# Altium PCB PPGColle.PcbDoc
Units mil, origin at the board's own origin, x right, y up, seen from the top; angles counter-clockwise.
Board outline 2000 x 2000 mil, 2 copper layers (Top Layer, Bottom Layer); 64 components, 66 nets, 270 pads, 85 vias.
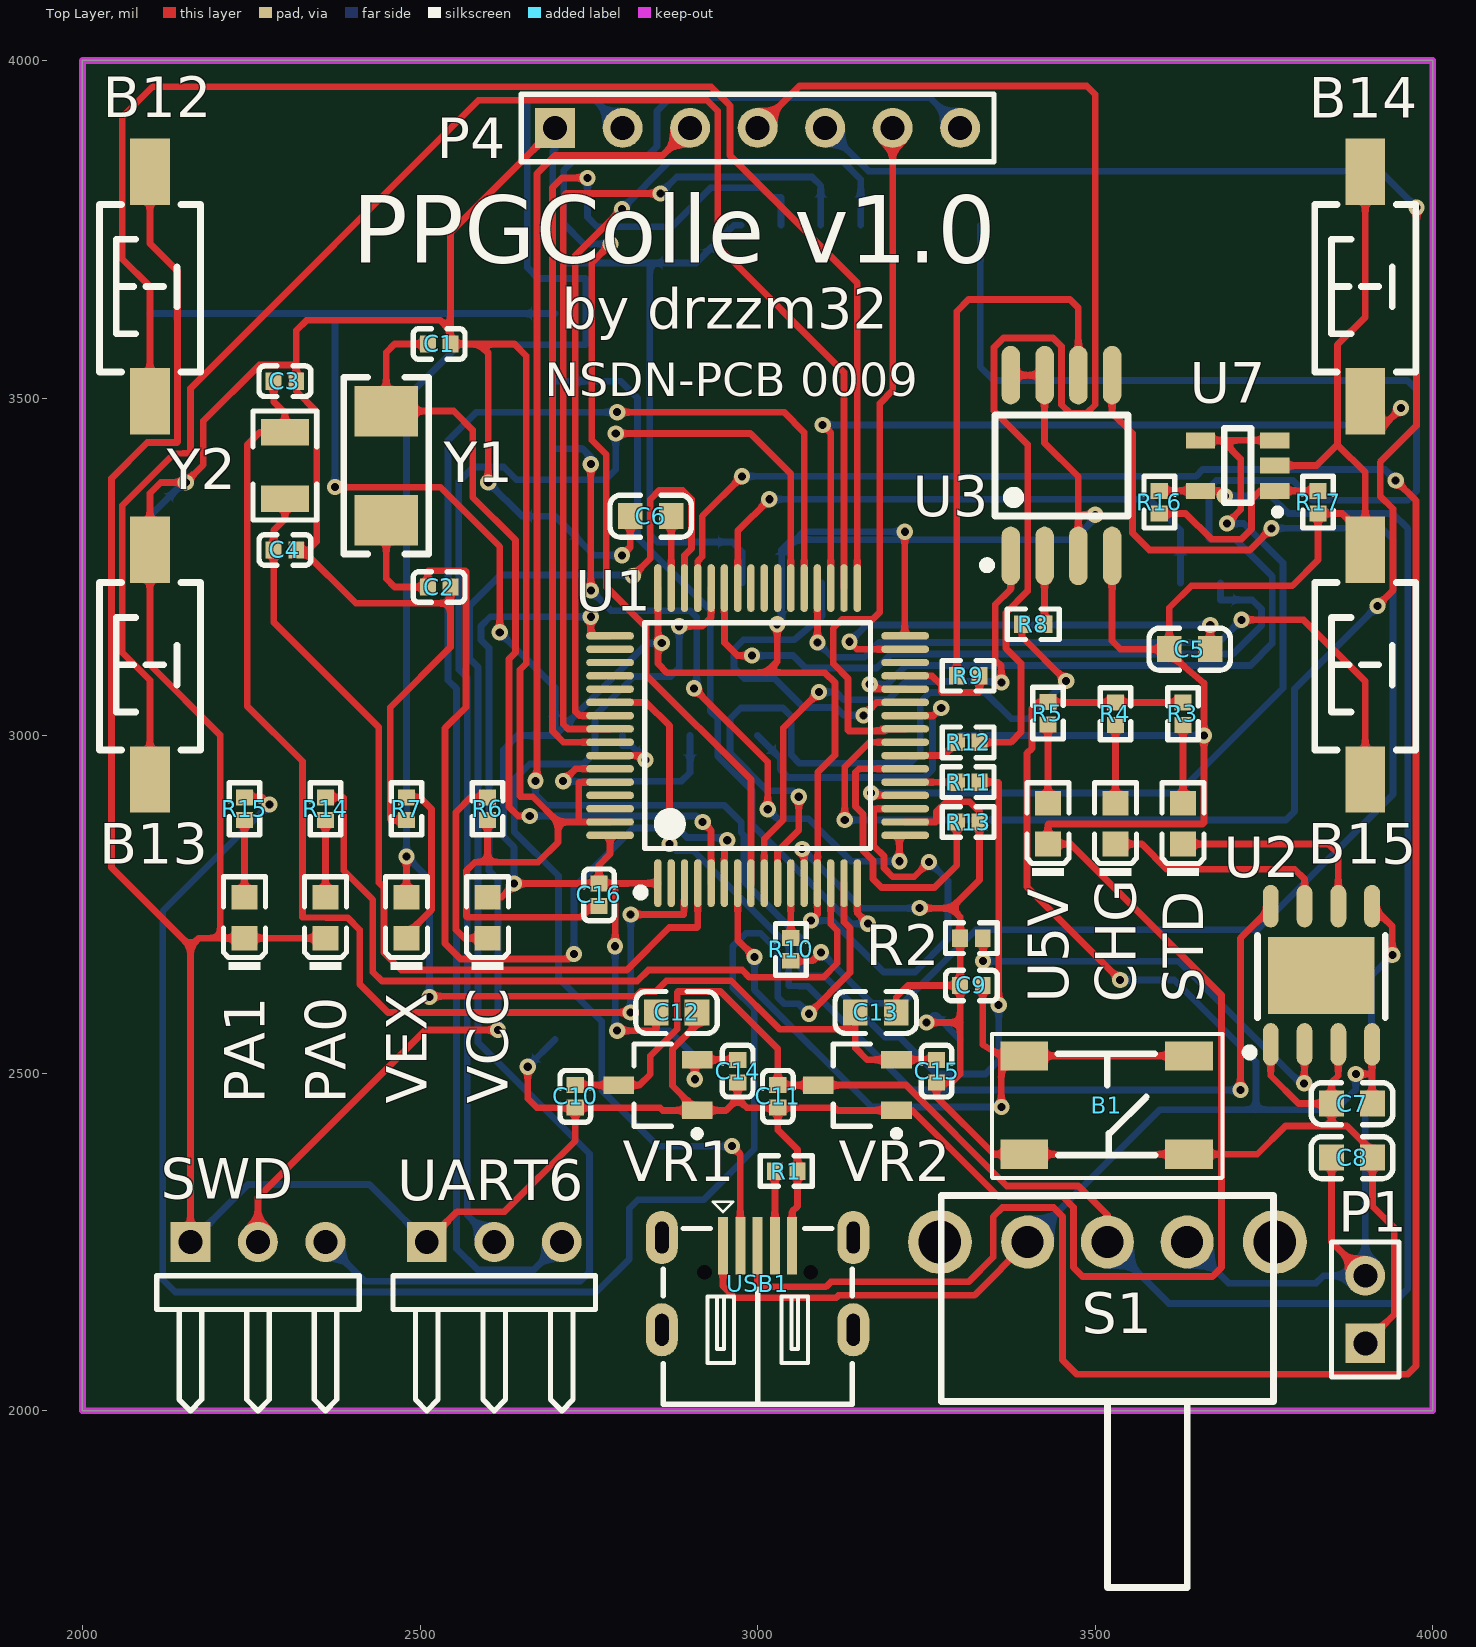
[diagram p0: Top Layer view]
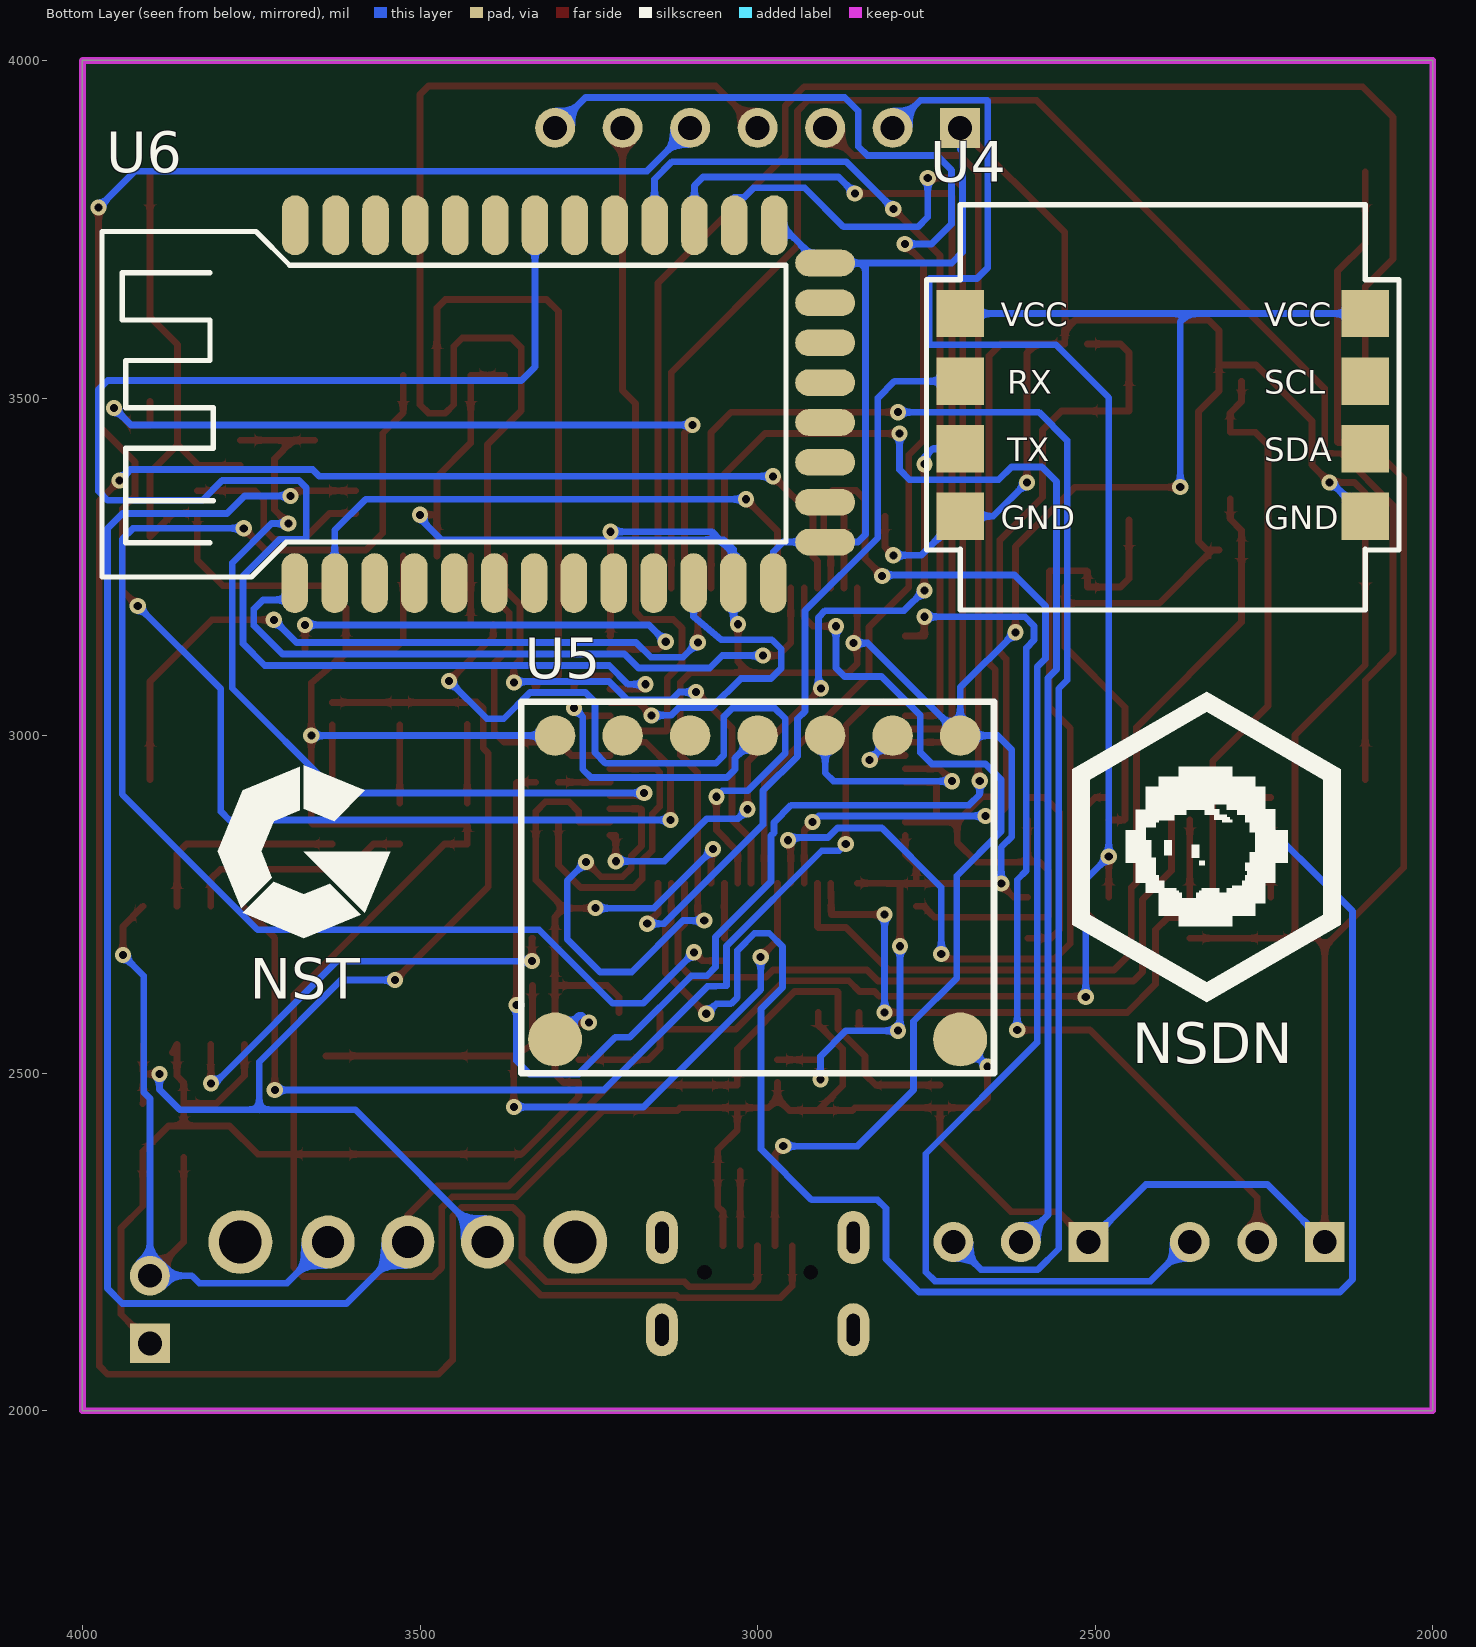
[diagram p1: Bottom Layer view, seen from below]
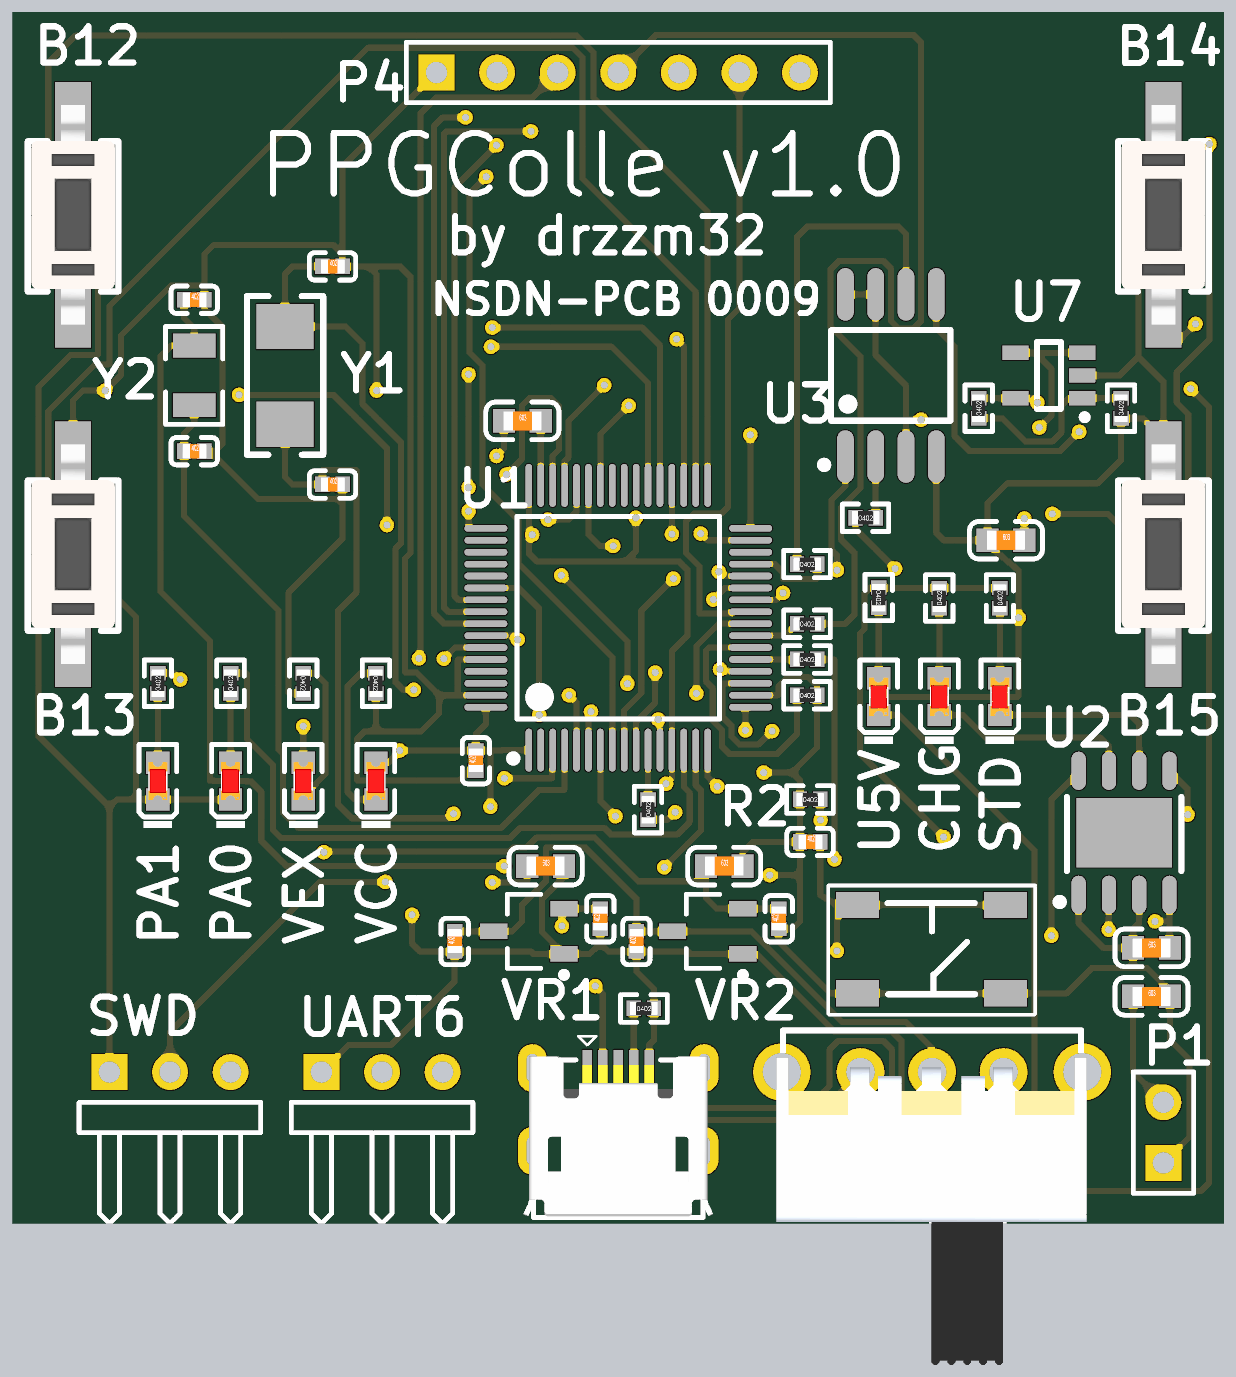
[diagram p2: 3D render of the assembled board from above, using the file's embedded part models]

## Layer stack, top to bottom
Top Solder: solder mask 0.4, Solder Resist, Dk 3.5
Top Layer: signal copper 1.4
Dielectric 1: dielectric 12.6, FR-4, Dk 4.8
Bottom Layer: signal copper 1.4
Bottom Solder: solder mask 0.4, Solder Resist, Dk 3.5

## Board outline
2000,2000 2000,4000 4000,4000 4000,2000

## Design rules (kind name [scope] priority, off if disabled: settings)
Clearance [All] p1: gap=6 ignorepadtopadclearanceinfootprint=FALSE
HoleSize [All] p1: absolutevalues=TRUE maxlimit=250 minlimit=11.81 maxpercent=80.000 minpercent=20.000
MinimumSolderMaskSliver [All] p1: minsoldermaskwidth=6
PolygonConnect [All] p1: connectstyle=Relief reliefconductorwidth=10 reliefentries=4 polygonreliefangle="90 Angle" airgapwidth=10
RoomDefinition PPGColle [InComponentClass('PPGColle')] p1: confinementstyle=ConfineIn formatcopy=TRUE lockcomponents=FALSE outline 2000,2000 4000,2000 4000,4000 2000,4000
RoutingVias [All] p1: holewidth=12 width=24 viastyle="Through Hole" minholewidth=11.81 minwidth=23.62 maxholewidth=28 maxwidth=50
SilkToSilkClearance [All] p1: silktosilkclearance=6
SilkToSolderMaskClearance [IsPad] p1: minsilkscreentomaskgap=6 clearancetoexposedcopper=TRUE
SolderMaskExpansion [All] p1: expansion=2
Width [All] p1: maxlimit=20 minlimit=6 preferedwidth=10
26 further rules are at their usual default settings.

## Components (designator, comment, footprint, x,y, rotation, side; value= is the part's Value field where it differs from the comment)
B1 "B1" MetalButton 3513.5,2454.41 r180 top locked
B12 "3x6x5" "TSW SMD-3*6*4.3" 2100,3665 r90 top locked (schematic designator SW1)
B13 "3x6x5" "TSW SMD-3*6*4.3" 2100,3105 r90 top locked (schematic designator SW2)
B14 "3x6x5" "TSW SMD-3*6*4.3" 3900,3665 r90 top locked (schematic designator SW3)
B15 "3x6x5" "TSW SMD-3*6*4.3" 3900,3105 r90 top locked (schematic designator SW4)
C1 "20pF (200) 5% 50V" 0402_C 2528.27,3580 r0 top
C2 "20pF (200) 5% 50V" 0402_C 2528.27,3220 r0 top
C3 "12pF (120) 5% 50V" 0402_C 2300,3525 r0 top
C4 "12pF (120) 5% 50V" 0402_C 2300,3275 r0 top
C5 "2.2uF (225) 10% 16V" 0603_C 3640,3127.95 r0 top
C6 "2.2uF (225) 10% 16V" 0603_C 2841.73,3325 r0 top
C7 "10uF (106) 10% 10V" 0603_C 3880.31,2455 r0 top
C8 "10uF (106) 10% 10V" 0603_C 3880.31,2375 r0 top
C9 "100nF (104) 10% 16V" 0402_C 3316.73,2630 r0 top
C10 "100nF (104) 10% 16V" 0402_C 2730,2465.63 r90 top
C11 "100nF (104) 10% 16V" 0402_C 3030,2465.63 r90 top
C12 "10uF (106) 10% 10V" 0603_C 2880,2590 r0 top
C13 "10uF (106) 10% 10V" 0603_C 3175,2590 r0 top
C14 "100nF (104) 10% 16V" 0402_C 2970.47,2503.03 r90 top
C15 "100nF (104) 10% 16V" 0402_C 3265,2503.03 r90 top
C16 "100nF (104) 10% 16V" 0402_C 2765,2764.09 r90 top
CHG "蓝灯 0603" 0603_LED_S1 3530,2869.68 r90 top locked (schematic designator D2)
NSDN "Comment" NSDN-OVERLAY 2535,2605 r180 bottom
NST "Comment" NST-OVERLAY 3800,2700 r180 bottom
P1 "BAT" HDR1X2 3900,2100 r90 top locked
P4 "OLED" HDR1X7 2700,3900 r0 top locked
PA0 "蓝灯 0603" 0603_LED_S1 2360,2730.31 r90 top locked (schematic designator D6)
PA1 "白灯 0603" 0603_LED_S1 2240,2730.31 r90 top locked (schematic designator D7)
R1 "100KΩ (1003) ±1%" 0402_R 3042.32,2355 r0 top
R2 "2KΩ (2001) ±1%" 0402_R 3316.73,2700 r0 top
R3 "1KΩ (1001) ±1%" 0402_R 3630,3032.48 r90 top
R4 "1KΩ (1001) ±1%" 0402_R 3530,3032.48 r90 top
R5 "1KΩ (1001) ±1%" 0402_R 3430,3033.27 r270 top
R6 "1KΩ (1001) ±1%" 0402_R 2600,2891.73 r270 top
R7 "1KΩ (1001) ±1%" 0402_R 2480,2891.73 r270 top
R8 "22Ω (22R0) ±1%" 0402_R 3408.27,3165 r0 top locked
R9 "22Ω (22R0) ±1%" 0402_R 3311.73,3088.58 r0 top locked
R10 "22Ω (22R0) ±1%" 0402_R 3049.21,2683.27 r90 top locked
R11 "22Ω (22R0) ±1%" 0402_R 3311.73,2931.1 r0 top locked
R12 "22Ω (22R0) ±1%" 0402_R 3311.73,2990 r0 top locked
R13 "22Ω (22R0) ±1%" 0402_R 3311.73,2872.05 r0 top
R14 "1KΩ (1001) ±1%" 0402_R 2360,2891.73 r90 top
R15 "1KΩ (1001) ±1%" 0402_R 2240,2891.73 r90 top
R16 "51KΩ (5102) ±1%" 0402_R 3595,3345.87 r90 top
R17 "51KΩ (5102) ±1%" 0402_R 3830,3345.87 r90 top
S1 "SS-12F23" SS-12F23 3518.03,2250 r270 top locked
STD "白灯 0603" 0603_LED_S1 3630,2869.68 r90 top locked (schematic designator D1)
SWD "SWD" HDR1X3H 2160,2250 r0 top locked (schematic designator P2)
U1 "STM32F405RGT6" LQFP-64_10x10x05P 3000,3000 r0 top locked
U2 "TP4056" SOP-8_EP_150mil 3835,2645 r0 top locked
U3 "W25Q128FVSIG" SOIC-8_208mil 3450,3400 r0 top locked
U4 "JY-61" JY-61 2750,3186 r180 bottom locked
U5 "MAX30102" MAX30102 2700,3000 r270 bottom locked
U5V "绿灯 0603" 0603_LED_S1 3430,2869.68 r90 top locked (schematic designator D3)
U6 "CC2541" CC2541 2910,3235.87 r90 bottom locked
U7 "LMV321IDBVRG4" SOT-23-5 3710.94,3400 r0 top locked
UART6 "USART6" HDR1X3H 2510,2250 r0 top locked (schematic designator P3)
USB1 "USB-5P" USB-MICRO_D 3000,2120 r0 top locked
VCC "红灯 0603" 0603_LED_S1 2600,2730.31 r90 top locked (schematic designator D4)
VEX "黄灯 0603" 0603_LED_S1 2480,2730.31 r90 top locked (schematic designator D5)
VR1 "XC6206P332MR" SOT-23-3L 2852.36,2482.36 r0 top
VR2 "XC6206P332MR" SOT-23-3L 3147.64,2482.36 r0 top
Y1 "8MHz ±20ppm 20pF" SMD-5032_2P 2450,3400 r90 top locked
Y2 "32.768KHz ±20ppm 12.5pF" "SMD-3215_2P FC - 135" 2300,3400 r90 top locked

## Footprints (in the part's own frame and the unit in brackets; to place one, negate y for a bottom-side part, rotate by r counter-clockwise, add the part's x,y. Pads: shape width x height; smd on the part's side, far side on the other; paste and mask are expansions set on the pad)
0402_C [mm]
  rect 0.6x0.65 smd mask+0.051: 1(-0.425,0) 2(0.425,0)
  silkscreen extent -0.98,-0.58 0.98,0.58, body extent -0.48,-0.3 0.52,0.3, height 0.2
0402_R [mm]
  rect 0.6x0.65 smd mask+0.051: 1(-0.425,0) 2(0.425,0)
  silkscreen extent -0.98,-0.58 0.98,0.58, body extent -0.57,-0.27 0.58,0.28, height 0.41
0603_C [mm]
  rect 0.93x0.98 smd: 1(-0.77,0) 2(0.77,0)
  silkscreen extent -1.53,-0.79 1.54,0.79, body extent -0.8,-0.4 0.8,0.4, height 0.3
0603_LED_S1 [mm]
  rect 0.93x0.98 smd: A(0.77,0) K(-0.77,0)
  silkscreen extent -1.97,-0.79 1.54,0.79, body extent -0.8,-0.4 0.8,0.4, height 0.6
CC2541 [mil]
  oval 88.74x39.37 smd: 1(-10,775.43) 2(-10,716.38) 3(-10,657.32) 4(-10,598.27) 5(-10,539.21) 6(-10,480.16) 7(-10,421.1) 8(-10,362.05) 9(-10,302.99) 10(-10,243.94) 11(-10,184.88) 12(-10,125.83) 13(-10,66.77) 22(520,65.43) 23(520,124.49) 24(520,183.54) 25(520,242.6) 26(520,301.65) 27(520,360.71) 28(520,419.76) 29(520,478.82) 30(520,537.87) 31(520,596.93) 32(520,655.98) 33(520,715.04) 34(520,775)
  oval 39.37x88.74 smd: 14(50.75,-10) 15(109.8,-10) 16(168.86,-10) 17(227.91,-10) 18(286.97,-10) 19(346.02,-10) 20(405.08,-10) 21(464.13,-10)
  silkscreen extent -1,48 511,1061
HDR1X2 [mm] "Connector; Header; 2 Position"
  rect 1.5x1.5 hole 0.9: 1(0,0)
  round 1.5 hole 0.9: 2(2.54,0)
  silkscreen extent -1.27,-1.27 3.81,1.27
HDR1X3H [mm] "Connector; Header; 3 Position; Right Angle"
  rect 1.5x1.5 hole 0.9: 1(0,0)
  round 1.5 hole 0.9: 2(2.54,0) 3(5.08,0)
  silkscreen extent -1.27,-6.35 6.35,-1.27
HDR1X7 [mm] "Connector; Header; 7 Position"
  rect 1.5x1.5 hole 0.9: 1(0,0)
  round 1.5 hole 0.9: 2(2.54,0) 3(5.08,0) 4(7.62,0) 5(10.16,0) 6(12.7,0) 7(15.24,0)
  silkscreen extent -1.27,-1.27 16.51,1.27
JY-61 [mil]
  rect 70x70 smd: 1(50,439) 2(50,339) 3(50,239) 4(50,139) 5(650,139) 6(650,239) 7(650,339) 8(650,439)
  silkscreen extent 0,0 700,600
LQFP-64_10x10x05P [mm]
  oval 0.28x1.8 smd mask+0.051: 1(-3.75,-5.55) 2(-3.25,-5.55) 3(-2.75,-5.55) 4(-2.25,-5.55) 5(-1.75,-5.55) 6(-1.25,-5.55) 7(-0.75,-5.55) 8(-0.25,-5.55) 9(0.25,-5.55) 10(0.75,-5.55) 11(1.25,-5.55) 12(1.75,-5.55) 13(2.25,-5.55) 14(2.75,-5.55) 15(3.25,-5.55) 16(3.75,-5.55) 33(3.75,5.55) 34(3.25,5.55) 35(2.75,5.55) 36(2.25,5.55) 37(1.75,5.55) 38(1.25,5.55) 39(0.75,5.55) 40(0.25,5.55) 41(-0.25,5.55) 42(-0.75,5.55) 43(-1.25,5.55) 44(-1.75,5.55) 45(-2.25,5.55) 46(-2.75,5.55) 47(-3.25,5.55) 48(-3.75,5.55)
  oval 1.8x0.28 smd mask+0.051: 17(5.55,-3.75) 18(5.55,-3.25) 19(5.55,-2.75) 20(5.55,-2.25) 21(5.55,-1.75) 22(5.55,-1.25) 23(5.55,-0.75) 24(5.55,-0.25) 25(5.55,0.25) 26(5.55,0.75) 27(5.55,1.25) 28(5.55,1.75) 29(5.55,2.25) 30(5.55,2.75) 31(5.55,3.25) 32(5.55,3.75) 49(-5.55,3.75) 50(-5.55,3.25) 51(-5.55,2.75) 52(-5.55,2.25) 53(-5.55,1.75) 54(-5.55,1.25) 55(-5.55,0.75) 56(-5.55,0.25) 57(-5.55,-0.25) 58(-5.55,-0.75) 59(-5.55,-1.25) 60(-5.55,-1.75) 61(-5.55,-2.25) 62(-5.55,-2.75) 63(-5.55,-3.25) 64(-5.55,-3.75)
  silkscreen extent -4.55,-6.05 4.25,4.25
MAX30102 [mil]
  round 60 smd: 1(0,0) 2(0,-100) 3(0,-200) 4(0,-300) 5(0,-400) 6(0,-500) 7(0,-600)
  round 80 smd: 8(450,0) 9(450,-600)
  silkscreen extent -50,-650 500,50
MetalButton [mm]
  rect 1.8x1.1 smd: 1(-3.19,1.89) 1(3.01,1.89) 2(-3.19,-1.81) 2(3.01,-1.81)
  silkscreen extent -4.44,-2.63 4.23,2.78
NSDN-OVERLAY [mil]
  silkscreen extent 1,0 399,460
NST-OVERLAY [mil]
  Top Layer region: 165.5,37.5
  Top Layer region: 172,32
  Top Layer region: 128,128
  Top Layer region: 192,128
  Top Layer region: 191,128
  silkscreen extent 1,0 256,256
"SMD-3215_2P FC - 135" [mm]
  rect 1x1.8 smd: 1(-1.25,0) 2(1.25,0)
  silkscreen extent -2.05,-1.2 2.05,1.2
SMD-5032_2P [mm]
  rect 1.9x2.4 smd: 1(-2.05,0) 2(2.05,0)
  silkscreen extent -3.33,-1.6 3.33,1.6
SOIC-8_208mil [mm]
  oval 0.7x2.2 smd: 1(-1.905,-3.4) 2(-0.635,-3.4) 3(0.635,-3.4) 4(1.905,-3.4) 5(1.905,3.4) 6(0.635,3.4) 7(-0.635,3.4) 8(-1.905,3.4)
  silkscreen extent -2.95,-3.9 2.5,1.9
SOP-8_EP_150mil [mm]
  rect 4x2.9 smd: 0(0,0)
  oval 0.6x1.6 smd: 1(-1.905,-2.6) 2(-0.635,-2.6) 3(0.635,-2.6) 4(1.905,-2.6) 5(1.905,2.6) 6(0.635,2.6) 7(-0.635,2.6) 8(-1.905,2.6)
  silkscreen extent -2.85,-3.05 2.4,1.5
SOT-23-3L [mm] "http://www.aosmd.com/res/packaging_information/SOT-23-3L.pdf"
  rect 1.15x0.65 smd: 1(1.475,-0.95) 2(1.475,0.95) 3(-1.475,0)
  silkscreen extent -0.9,-1.95 1.6,1.55, body extent -0.9,-1.55 0.9,1.55, height 1.25
SOT-23-5 [mm]
  rect 1.1x0.6 smd: 1(1.4,-0.95) 2(1.4,0) 3(1.4,0.95) 4(-1.4,0.95) 5(-1.4,-0.95)
  silkscreen extent -0.5,-1.87 1.63,1.4
SS-12F23 [mm] "脚距3mm"
  round 2.4 hole 1.6: 0(0,6.3) 0(0,-6.3)
  round 2 hole 1.2: 1(0,3) 2(0,0) 3(0,-3)
  silkscreen extent -1.75,-6.25 13,6.25, body extent -0.61,-6.52 12.29,6.48, height 5.75
"TSW SMD-3*6*4.3" [mm] "3*6*4.3mm"
  rect 2.5x1.5 smd: 1(-4.318,0) 2(4.318,0)
  silkscreen extent -3.21,-1.9 3.09,1.9, body extent -4.6,-1.75 4.6,1.75, height 4.4
USB-MICRO_D [mm] "micro型USB ，6.7*7.5*2.5mm"
  oval 1.2x2 hole 0.5 slot 1.2 at 90 deg: 0(-3.6,0) 0(-3.6,3.47) 0(3.6,0) 0(3.6,3.47)
  round 0 hole 0.55 unplated: 0(-2,2.17) 0(2,2.17)
  rect 0.381x2.15 smd: 1(-1.3,3.16) 2(-0.65,3.16) 3(0,3.16) 4(0.65,3.16) 5(1.3,3.16)
  silkscreen extent -3.56,-2.79 3.56,4.81, body extent -3.99,-2.75 3.99,3.95, height 2.79

## Part data
B1: library part MetalButton
B12 B13 B14 B15: library part "TSW 3x6", "3x6轻触开关"
C1 C2: library part "0402 20pF (200) 5% 50V", "贴片电容", Package=0402, SuppliersPartNumber=C1554, ComponentLink1Description=供?, ComponentLink1URL=http://www.szlcsc.com/product/details_1906.html, Supplier=LC
C3 C4: library part "0402 12pF (120) 5% 50V", "贴片电容", Package=0402, SuppliersPartNumber=C1547, ComponentLink1Description=供?, ComponentLink1URL=http://www.szlcsc.com/product/details_1899.html, Supplier=LC
C5 C6: library part "0603 2.2uF (225) 10% 16V", "贴片电容", Package=0603, SuppliersPartNumber=C23630, ComponentLink1Description=供?, ComponentLink1URL=http://www.szlcsc.com/product/details_24366.html, Supplier=LC
C7 C8 C12 C13: library part "0603 10uF (106) 10% 10V", "贴片电容", Package=0603, SuppliersPartNumber=C19702, ComponentLink1Description=供?, ComponentLink1URL=http://www.szlcsc.com/product/details_20411.html, Supplier=LC
C9 C10 C11 C14 C15 C16: library part "0402 100nF (104) 10% 16V", "贴片电容", Package=0402, SuppliersPartNumber=C1525, ComponentLink1Description=供?, ComponentLink1URL=http://www.szlcsc.com/product/details_1877.html, Supplier=LC
CHG PA0: library part "0603 蓝灯", "发光二极管", Package=0603, SuppliersPartNumber=C72041, ComponentLink1Description=供?, ComponentLink1URL=http://www.szlcsc.com/product/details_73150.html, Supplier=LC
P1: library part "Header 2", "Header, 2-Pin", LatestRevisionDate=17-Jul-2002, LatestRevisionNote="Re-released for DXP Platform.", Publisher="Altium Limited"
P4: library part "Header 7", "Header, 7-Pin", LatestRevisionDate=17-Jul-2002, LatestRevisionNote="Re-released for DXP Platform.", Publisher="Altium Limited"
PA1 STD: library part "0603 白灯", "发光二极管", Package=0603, SuppliersPartNumber=C2290, ComponentLink1Description=供?, ComponentLink1URL=http://www.szlcsc.com/product/details_2663.html, Supplier=LC
R1: library part "0402 100KΩ (1003) 1%", "贴片电阻", Package=0402, SuppliersPartNumber=C25741, ComponentLink1Description=供?, ComponentLink1URL=http://www.szlcsc.com/product/details_26484.html, Supplier=LC
R2: library part "0402 2KΩ (2001) 1%", "贴片电阻", Package=0402, SuppliersPartNumber=C4109, ComponentLink1Description=供?, ComponentLink1URL=http://www.szlcsc.com/product/details_4516.html, Supplier=LC
R3 R4 R5 R6 R7 R14 R15: library part "0402 1KΩ (1001) 1%", "贴片电阻", Package=0402, SuppliersPartNumber=C11702, ComponentLink1Description=供?, ComponentLink1URL=http://www.szlcsc.com/product/details_12256.html, Supplier=LC
R8 R9 R10 R11 R12 R13: library part "0402 22Ω (22R0) 1%", "贴片电阻", Package=0402, SuppliersPartNumber=C25092, ComponentLink1Description=供?, ComponentLink1URL=http://www.szlcsc.com/product/details_25835.html, Supplier=LC
R16 R17: library part "0402 51KΩ (5102) 1%", "贴片电阻", Package=0402, SuppliersPartNumber=C25794, ComponentLink1Description=供?, ComponentLink1URL=http://www.szlcsc.com/product/details_26537.html, Supplier=LC
S1: library part SSW-1P, "1路波动开关"
SWD UART6: library part "Header 3H", "Header, 3-Pin, Right Angle", LatestRevisionDate=17-Jul-2002, LatestRevisionNote="Re-released for DXP Platform.", Publisher="Altium Limited"
U1: "ARM", Package=LQFP-64_10x10x05P, SuppliersPartNumber=C15742, ComponentLink1Description=供?, ComponentLink1URL=http://www.szlcsc.com/product/details_16424.html, Supplier=LC
U2: library part TP4056_[C16581], "电池电源管理", Package=SOP-8_EP_150mil, SuppliersPartNumber=C16581, ComponentLink1Description=供?, ComponentLink1URL=http://www.szlcsc.com/product/details_17264.html, Supplier=LC
U3: library part W25Q128FVSIG_[C35101], "Flash ROM", Package=SOIC-8, SuppliersPartNumber=C35101, ComponentLink1Description=供?, ComponentLink1URL=http://www.szlcsc.com/product/details_36072.html, Supplier=LC
U5V: library part "0603 绿灯", "发光二极管", Package=0603, SuppliersPartNumber=C72043, ComponentLink1Description=供?, ComponentLink1URL=http://www.szlcsc.com/product/details_73152.html, Supplier=LC
U7: library part LMV321IDBVRG4_[C7972], "运放", Package=SOT-23-5, SuppliersPartNumber=C7972, ComponentLink1Description=供?, ComponentLink1URL=http://www.szlcsc.com/product/details_8449.html, Supplier=LC
USB1: "微型USB母座"
VCC: library part "0603 红灯", "发光二极管", Package=0603, SuppliersPartNumber=C2286, ComponentLink1Description=供?, ComponentLink1URL=http://www.szlcsc.com/product/details_2659.html, Supplier=LC
VEX: library part "0603 黄灯", "发光二极管", Package=0603, SuppliersPartNumber=C72038, ComponentLink1Description=供?, ComponentLink1URL=http://www.szlcsc.com/product/details_73147.html, Supplier=LC
VR1 VR2: library part "SOT-23 XC6206P332MR", "低压差线性稳压(LDO)", Package=SOT-23, SuppliersPartNumber=C5446, ComponentLink1Description=供?, ComponentLink1URL=http://www.szlcsc.com/product/details_5896.html, Supplier=LC
Y1: library part "SMD-5032_2P 8MHz 20ppm 20pF", "贴片晶振", Package=SMD-5032_2P, SuppliersPartNumber=C115962, ComponentLink1Description=供?, ComponentLink1URL=http://www.szlcsc.com/product/details_117214.html, Supplier=LC
Y2: library part "SMD-3215_2P 32.768KHz 20ppm 12.5pF", "贴片晶振", Package=SMD-3215_2P, SuppliersPartNumber=C32346, ComponentLink1Description=供?, ComponentLink1URL=http://www.szlcsc.com/product/details_33310.html, Supplier=LC

## Via types
v1: diameter 24, hole 12, Top Layer to Bottom Layer, 85 vias

## Nets (pads, with @x,y where several pads share a name; then routed paths per layer and width w, separated by ;. In a path a pad name is that pad's centre, name@x,y a point inside that pad or via, vN(x,y) a via of type N, cw(c..) or ccw(c..) an arc to the next point about the centre after c; other vN are vias at no path point)
BAT_ADC: U1.20 U7.3 U7.4 | length 1272.8
  Top Layer w10: v1(3168,2915) 3171.58,2911.42 U1.20 ; U7.4 3688,3437.4 ; v1(3695,3314) 3715.48,3334.48 3715.48,3409.92 3688,3437.4 ; U7.3 3688,3437.4
  Bottom Layer w10: v1(3168,2915) 3623,2915 3778.12,3070.12 3778.12,3255.88 3720,3314 v1(3695,3314)
BAT_CE: U1.54 U2.8 | length 1598.5
  Top Layer w10: U1.54 2835,3049.21 2869.5,3014.71 v1(2869.5,2839.6) ; v1(3715,2475) 3715,2700 U2.8@3761.18,2746.18
  Bottom Layer w10: v1(2869.5,2839.6) 2879.6,2829.5 2905,2829.5 3046,2688.5 3046,2629.37 3074.46,2628.37 3227.82,2475 v1(3715,2475)
BLE_LED: U1.56 U6.24 | length 1311.2
  Top Layer w10: U1.56 2719.16,3009.84 2712.12,3016.88 2712.12,3798.62 2716.5,3803 v1(2856,3803)
  Bottom Layer w10: v1(2856,3803) 2880.24,3827.24 3080.76,3827.24 3093.54,3814.46 U6.24
BLE_MODE: U1.28 U6.28 | length 2318.7
  Top Layer w10: v1(3166,3076) 3173.1,3068.9 U1.28
  Bottom Layer w10: v1(3166,3076) 3191.75,3076 3219.75,3104 3730,3104 3762.12,3136.12 3762.12,3236.12 3707.24,3291 3669.36,3291 3668.36,3292 3668.36,3367 3679.36,3378 3793,3378 3822.5,3348.5 3962.5,3348.5 3976,3362 3976,3512.5 3962.5,3526 3350,3526 3329.76,3546.24 U6.28
BLE_RST: U1.27 U6.11 | length 516.4
  Top Layer w10: v1(3157,3030) 3176.21,3049.21 U1.27
  Bottom Layer w10: U6.11 3094.88,3176 3054,3142 2979,3142 2964.87,3127.87 2964.87,3100.13 2980.23,3084.77 3024.85,3084.77 3068.11,3041.5 3116.48,3041.5 3127.98,3030 v1(3157,3030)
BLE_STE: U1.55 U6.25 | length 1288.5
  Top Layer w10: U1.55 2736,3029.53 2730,3035.53 2730,3711 v1(2799,3780)
  Bottom Layer w10: v1(2799,3780) 2869,3850 3126.6,3850 3152.6,3824 U6.25
BLE_WKUP: U1.57 U6.23 | length 1376.6
  Top Layer w10: v1(2748,3826) 2710.42,3826 2696.12,3811.7 2696.12,3006.54 2712.5,2990.16 U1.57
  Bottom Layer w10: v1(2748,3826) 2748,3768 2762.5,3753.5 2872.5,3753.5 2930.24,3811.24 3006,3811.24 3020.24,3797 3034.49,3797 U6.23
FLASH_CS: U1.9 U3.1 | length 804
  Top Layer w10: U1.9 3009.84,2847.13 3038,2875.28 3038,3011.39 v1(3091.11,3064.5) ; v1(3361,3078.52) 3361,3103.05 3352,3112.05 3352,3194 3375,3217 U3.1
  Bottom Layer w10: v1(3091.11,3064.5) 3116.11,3064.5 3127.61,3053 3193,3053 3220,3080 3359.52,3080 v1(3361,3078.52)
GND: B1.1 B12.2 B13.2 B14.2 B15.2 C1.2 C2.2 C3.2 C4.2 C5.1 C6.1 C7.1 C8.2 C9.1 C10.1 C11.1 C12.2 C13.2 C14.1 C15.1 C16.1 P1.1 P4.1 PA0.K PA1.K R1.2 R2.1 R6.2 R7.2 R13.2 R17.1 SWD.1 U1.12 U1.18 U1.60 U1.63 U2.1 U2.3 U3.4 U4.4 U4.5 U5.7 U5.8 U5.9 U5V.K U6.13 U6.14 U6.21 U6.22 U7.2 UART6.1 USB1.5 VR1.1 VR2.1 | length 15810.6
  Top Layer w10: B12.2 2100,3729 2141,3688 2141,3435 2140,3434 2096,3434 2043,3381 2043,2804.5 2160,2687.5 ; SWD.1 2160,2687.5 ; C4.2 C4.2@2326,3275 ; PA0.K PA1.K 2204,2700 ; R7.2 2457,2875 2456,2876 2456,3042 2545,3131 2545,3196 ; UART6.1 2555,2295 2625,2295 2730,2400 C10.1 ; C2.2 2545,3196 ; R6.2 2600,2812.5 ; v1(2601,3375) 2601,3566.5 2587.5,3580 ; v1(2659.6,2509.6) 2659.6,2462.5 2673.2,2448.9 C10.1 ; P4.1 2545,3745 2545,3600 ; C16.1 2754.3,2747.36 2737.94,2731 2570,2731 2569,2732 2569,2800 2581.5,2812.5 2600,2812.5 ; U1.63 2736,2872.05 ; U1.60 2736,2931.1 2735,2930.1 2735,2873.05 2736,2872.05 ; v1(2799,3267) 2811.42,3279.42 C6.1 ; C12.2 2910.32,2572.32 2874,2536 2874,2481.39 VR1.1 ; C14.1 2970.47,2462.5 ; USB1.5 3051.18,2295 3059.05,2302.87 R1.2 3059.05,2387 3030,2416.05 C11.1 ; v1(3066,2832) 3068.9,2829.1 U1.12 ; C13.2 3205.32,2612.5 3222.82,2630 C9.1 ; U1.18 3264,2872.05 3265,2873.05 3265,2887.5 3279.5,2902 3313.96,2902 3328.46,2887.5 R13.2 3328.46,2786 3286.96,2744.5 ; v1(3240,2744.5) 3286.96,2744.5 ; v1(3250,2575) 3300,2575 ; U3.4 3525,3140.45 3537.5,3127.95 C5.1 ; U2.1 3760,2496.21 3801.21,2455 C7.1 ; U7.2 3828,3400 3859,3431 ; U2.3@3866.67,2530.51 U2.3 3860,2496.3 3850,2486.3 C7.1 ; P1.1 3943,2143 3943,2270.63 3910.63,2303 C8.2 3910.63,2384 3872.63,2422 3850,2422 ; B14.2 3900,3620 3859,3579 3859,3431 ; 2160,2687.5 2172.5,2700 2204,2700 ; 2204,2700 2204,3001 2100,3105 B13.2 2100,3359 2116,3375 v1(2153,3375) 2179,3401 2179,3465.8 2262,3548.8 2315,3548.8 2316.73,3547.06 ; 2316.73,3547.06 2316.73,3600 2331.73,3615 2530,3615 2545,3600 ; 2316.73,3547.06 C3.2 2316.73,3510.27 2347,3480 2347,3287.5 2334.5,3275 C4.2@2326,3275 ; C4.2@2326,3275 2405,3196 2545,3196 ; 2545,3600 C1.2 2587.5,3580 ; 2587.5,3580 2639.78,3580 2657.28,3562.5 2657.28,3106.95 2647.94,3097.6 2647.94,2910.56 2649,2909.5 2666.96,2909.5 2704.42,2872.05 ; 2600,2812.5 2675,2812.5 2704.42,2841.92 2704.42,2872.05 ; 2704.42,2872.05 2736,2872.05 ; C10.1 2855.74,2448.9 2859.67,2444.96 VR1.1 ; VR1.1 2952.93,2444.96 2970.47,2462.5 ; 2970.47,2462.5 2984.07,2448.9 C11.1 ; C11.1 3115,2448.9 3118.94,2444.96 VR2.1 3229,2444.96 3356.96,2317 3452,2317 3467.66,2301.34 3467.66,2212.5 3481.16,2199 3673.5,2199 3687,2212.5 3687,2379 3686,2380 ; 3286.96,2744.5 3300,2731.46 R2.1 C9.1 ; 3300,2575 C9.1 ; 3300,2575 3300,2498.8 3287.5,2486.3 C15.1 3265,2465 3350,2380 3395,2380 3639.09,2380 3686,2380 ; C5.1 3609.69,3189.37 3642.31,3222 3792,3222 3830,3260 R17.1 3865.87,3329.13 3900,3295 3900,3389.51 3859,3430.51 3859,3431 ; C5.1 3609.69,3121 3661,3078 v1(3661,3000) 3661,2871 3659,2869 3431,2869 3430,2868 U5V.K 3463.63,2839.37 3687,2616 3687,2381 3686,2380 ; 3686,2380 3740,2380 3782,2422 3850,2422 ; 3850,2422 C7.1
  Bottom Layer w10: U4.5 2150,3375 v1(2153,3375) ; SWD.1 2245,2335 2425,2335 UART6.1 ; v1(2601,3375) 2651,3325 U4.4 2758,3267 v1(2799,3267) ; v1(2659.6,2509.6) U5.8 ; P4.1 2700,3868.5 2696.5,3865 2696.5,3716 2712.5,3700 2840,3700 2840.07,3700.07 2840.07,3700 ; U6.22 2964.87,3755.87 2909,3700 U6.21 2840.07,3700 ; U6.13 2976.77,3272.34 2962.5,3286.61 U6.14 2851.39,3286.61 2840.07,3297.93 2840.07,3700 ; v1(3066,2832) 3153.5,2744.5 v1(3240,2744.5) ; v1(3250,2575) 3261,2586 3264,2586 U5.9 ; U5.7 v1(3661,3000)
I2C1_SCL: U1.58 U5.2 | length 112.9
  Top Layer w10: U1.58 2827.53,2970.47 v1(2834,2964)
  Bottom Layer w10: U5.2 2800,2985 2813,2985 v1(2834,2964)
I2C1_SDA: U1.59 U5.3 | length 325.2
  Top Layer w10: v1(2712,2932.5) 2730.29,2950.79 U1.59
  Bottom Layer w10: v1(2712,2932.5) 2887.5,2932.5 2900,2945 U5.3
KEY_A: B12.1 U1.33 | length 2160.9
  Top Layer w10: B12.1 2100,3665 2059,3706 2059,3916 2104,3961 2931,3961 2959,3933 2959,3859 3147.64,3670.36 U1.33
KEY_B: B13.1 U1.34 | length 2399.7
  Top Layer w10: B13.1 2100,3082 2059,3123 2059,3341 2135.42,3417.42 2160.11,3418.53 2160.11,3514.3 2586.81,3941 2925,3941 2941,3925 2941,3725 3127.95,3538.05 U1.34
KEY_C: B14.1 U1.35 | length 1211.8
  Top Layer w10: v1(3096.36,3460) 3108.27,3448.1 U1.35 ; B14.1 3900,3460 3928,3460 v1(3953,3485)
  Bottom Layer w10: v1(3096.36,3460) 3928,3460 v1(3953,3485)
KEY_D: B15.1 U1.36 | length 1106.9
  Top Layer w10: v1(3088.58,3138) U1.36 ; v1(3716.5,3171.5) 3808.5,3171.5 3900,3080 B15.1
  Bottom Layer w10: v1(3088.58,3138) 3110.58,3116 3158,3116 3180,3138 3683,3138 v1(3716.5,3171.5)
LED_A: R14.2 U1.14 | length 1139
  Top Layer w10: R14.2 2386,2908.46 2387,2907.46 2387,2800 2430,2757 2430,2650 2443.54,2636.46 2821.73,2636.46 2838.17,2652.91 2977.21,2652.91 2988.12,2642 3097.17,2642 3118,2662.83 3118,2711 3108.27,2720.73 U1.14
LED_B: R15.2 U1.15 | length 2572.5
  Top Layer w10: R15.2 2266.54,2908.46 v1(2277,2898) ; v1(3076,2588) 3136.86,2648.86 3136.86,2714.77 3127.95,2723.68 U1.15
  Bottom Layer w10: v1(2277,2898) 2119,2740 2119,2194.5 2137.5,2176 2761,2176 2810,2225 2810,2300 2822.5,2312.5 2920,2312.5 2995,2387.5 2995,2595 2963,2627 2963,2687.5 2982.8,2707.3 3004.57,2707.3 3030,2681.87 3030,2612.37 3039.63,2602.74 3061.26,2602.74 v1(3076,2588)
MAX_INT: U1.26 U5.4 | length 454
  Top Layer w10: U1.26 3260.53,3029.53 v1(3272,3041)
  Bottom Layer w10: U5.4 3033.41,2966.59 3033.41,2950 3045.41,2938 3247,2938 3259,2950 3259,3028 v1(3272,3041)
NetB1_2: B1.2 C9.2 U1.7 | length 1079.4
  Top Layer w10: U1.7 2970.47,2697.28 v1(2995.5,2672.25) ; C9.2 3333.46,2542.21 B1.2@3361,2525.67 ; v1(3361,2450) B1.2@3361,2525.67 ; B1.2@3639.09,2525.67 3395,2525.67 B1.2@3361,2525.67
  Bottom Layer w10: v1(2995.5,2672.25) 2995.5,2623.5 3169,2450 v1(3361,2450)
NetC1_1: C1.1 U1.5 Y1.2 | length 1273
  Top Layer w10: C1.1 2462.5,3580 2450,3567.5 Y1.2 2550,3480.71 2578,3452.71 2578,3353 2641.28,3289.72 2641.28,3122.95 2631.94,3113.6 2631.94,2894.56 2645.5,2881 v1(2662.5,2881) ; v1(2918.6,2872) 2931.1,2859.5 U1.5
  Bottom Layer w10: v1(2662.5,2881) 2909.6,2881 v1(2918.6,2872)
NetC2_1: C2.1 U1.6 Y1.1 | length 1435.9
  Top Layer w10: Y1.1 2450,3232.5 2462.5,3220 C2.1 2511.54,3243 2512.54,3244 2567,3244 2568,3243 2568,3042 2537,3011 2537,2692 2560,2669 2720.5,2669 v1(2728,2676.5) ; U1.6 2950.79,2840.79 v1(2955,2845)
  Bottom Layer w10: v1(2728,2676.5) 2728,2775 2816,2863 2881.6,2863 2895.6,2849 2951,2849 v1(2955,2845)
NetC3_1: C3.1 U1.3 Y2.2 | length 1741.5
  Top Layer w10: C3.1 2283.27,3494.73 2300,3478 Y2.2 2262.5,3449.21 2244,3430.71 2244,3044 2326,2962 2326,2731 2393.16,2730 2410.66,2712.5 2410.66,2631.84 2452.5,2590 v1(2812,2590) ; v1(2812,2735) 2890.73,2735 U1.3
  Bottom Layer w10: v1(2812,2590) v1(2812,2735)
NetC4_1: C4.1 U1.4 Y2.1 | length 1313.2
  Top Layer w10: Y2.1 2300,3320.73 2283.27,3304 C4.1 2283.27,3168 2439,3012.27 2439,2782.47 2446.5,2774.97 2446.5,2678.72 2472.22,2653 2806.27,2653 2869.1,2715.84 2910.25,2715.84 2911.42,2717 U1.4
NetC5_2: C5.2 U1.31 | length 667.8
  Top Layer w10: v1(3136,3139) 3147.05,3127.95 U1.31 ; C5.2 v1(3670.32,3164)
  Bottom Layer w10: v1(3136,3139) 3161,3164 v1(3670.32,3164)
NetC6_2: C6.2 U1.47 | length 106.5
  Top Layer w10: U1.47 C6.2
NetC8_1: C8.1 P1.2 S1.1 U2.5 | length 1065.7
  Top Layer w10: C8.1 3850,2250 P1.2 ; U2.5 3940,2717.36 v1(3940,2675)
  Bottom Layer w10: S1.1 3697.14,2189 3827,2189 3838,2200 P1.2 3900,2462.69 3909.31,2472 3909.31,2644.31 v1(3940,2675)
NetD1_A: R3.1 STD.A | length 115.7
  Top Layer w10: STD.A R3.1
NetD1_K: STD.K U2.6 | length 313.6
  Top Layer w10: STD.K 3845.63,2839.37 3860,2825 U2.6
NetD2_A: CHG.A R4.1 | length 115.7
  Top Layer w10: CHG.A R4.1
NetD2_K: CHG.K U2.7 | length 341.6
  Top Layer w10: CHG.K 3569,2839.37 3606.37,2802 3795.5,2802 3810,2787.5 U2.7
NetD3_A: R5.2 U5V.A | length 116.5
  Top Layer w10: U5V.A R5.2
NetD4_K: R6.1 VCC.K | length 282.3
  Top Layer w10: VCC.K 2565.5,2700 2553,2712.5 2553,2886.46 2575,2908.46 R6.1
NetD5_K: R7.1 VEX.K | length 250.8
  Top Layer w10: VEX.K 2480,2705 2517,2742 2517,2891.46 2500,2908.46 R7.1
NetD6_A: PA0.A R14.1 | length 114.4
  Top Layer w10: PA0.A R14.1
NetD7_A: PA1.A R15.1 | length 114.4
  Top Layer w10: PA1.A R15.1
NetP3_2: U1.38 UART6.2 | length 1910
  Top Layer w10: v1(2789.84,3447.34) 2989.16,3447.34 3049.21,3387.29 U1.38
  Bottom Layer w10: UART6.2 2570,2290 2570,3085.5 2557.5,3098 2557.5,3376.5 2579,3398 2624,3398 2643,3379 2775,3379 2789.84,3393.84 v1(2789.84,3447.34)
NetP3_3: U1.37 UART6.3 | length 2175.8
  Top Layer w10: v1(2792,3479) 3039,3479 3068.9,3449.1 U1.37
  Bottom Layer w10: UART6.3 2669,2209 2585,2209 2554,2240 2554,3069.5 2541.5,3082 2541.5,3437 2583.5,3479 v1(2792,3479)
NetP4_3: P4.3 R11.2 | length 2556.1
  Top Layer w10: v1(2671,2933) 2673.28,2935.28 2673.28,3832.28 2700,3859 2859,3859 P4.3 ; R11.2 3356,2931.1 3357,2930.1 v1(3357,2601)
  Bottom Layer w10: v1(2671,2933) 2671,2913 2687,2897 2950.32,2897 2975.84,2871.47 2975.84,2855.96 2980,2851.81 2980,2784 3062.27,2701.73 3062.27,2657.1 3075,2644.37 3098.23,2644.37 3189.51,2553.08 3210.92,2553.08 3265,2499 3337.5,2499 3357,2518.5 v1(3357,2601)
NetP4_4: P4.4 R12.2 | length 1928.9
  Top Layer w10: P4.4 3062,3962 3487.5,3962 3500,3949.5 3500,3490 3487.5,3477.5 3462.5,3477.5 3450,3490 3450,3576.5 3437.5,3589 3364.22,3589 3350.22,3575 3350.22,3481 3400,3431.22 3400,3214 3368,3182 3368,3129.25 3390.2,3107.05 3390.2,3005.2 3375,2990 R12.2
NetR1_1: R1.1 USB1.4 | length 110.6
  Top Layer w10: USB1.4 R1.1
NetR2_2: R2.2 U2.2 | length 642.9
  Top Layer w10: R2.2 3334,2700 v1(3334,2666) ; v1(3809.5,2485) 3809.5,2504.5 3810,2505 U2.2
  Bottom Layer w10: v1(3334,2666) 3623,2666 3804,2485 v1(3809.5,2485)
NetR8_2: R8.2 U3.2 | length 101.1
  Top Layer w10: R8.2 U3.2
NetR9_1: R9.1 U3.6 | length 832
  Top Layer w10: R9.1 3295,3628.5 3312.5,3646 3462.5,3646 3475,3633.5 U3.6
NetR10_1: R10.1 U3.5 | length 2096.8
  Top Layer w10: R10.1 3081.54,2666.54 v1(3094,2679) ; U3.5 3525,3478 3555.2,3447.8 3555.2,3300 3580.2,3275 3729,3275 v1(3761,3307)
  Bottom Layer w10: v1(3094,2679) 3169.5,2603.5 3214.5,2603.5 3323.5,2712.5 3740.5,2712.5 3941,2913 3941,3291 3925,3307 v1(3761,3307)
NetR16_1: R16.1 R17.2 U7.1 | length 306.3
  Top Layer w10: R16.1 3633.87,3329.13 3672,3291 3716.56,3291 3731.48,3305.92 3731.48,3350 3744.08,3362.6 U7.1 R17.2
OLED_CS: P4.7 U1.8 | length 1897.6
  Top Layer w10: v1(2782,3728) 2754.5,3700.5 2754.5,3437.5 2776,3416 2776,3219.93 2835,3160.93 2835,3090 2990.16,2934.84 U1.8
  Bottom Layer w10: v1(2782,3728) 2742.5,3728 2713,3757.5 2713,3837.5 2734.5,3859 2837.5,3859 2851,3872.5 2851,3925 2871,3945 3255,3945 P4.7
OLED_DC: P4.6 U1.25 | length 1051.7
  Top Layer w10: P4.6 3200,3511 3181,3492 3181,3183 3170.07,3172.07 3125,3172.07 3112,3159.07 3112,3106.76 3134,3084.76 3134,3008 3135,3007 3184,3007 3184,3009.84 U1.25
OLED_RST: P4.5 U1.24 | length 2764.5
  Top Layer w10: v1(3129,2875) 3129,2953.5 3165.66,2990.16 U1.24 ; v1(3918,3192) 3941,3215 3941,3336 3922,3355 3922,3405 3976,3459 v1(3976,3782)
  Bottom Layer w10: P4.5 3164,3836 3922,3836 v1(3976,3782) ; v1(3129,2875) 3782.5,2875 3795,2887.5 3795,3069 v1(3918,3192)
SPI1_CLK: R11.1 U1.21 | length 76.5
  Top Layer w10: U1.21 R11.1
SPI1_MISO: R13.1 U1.22 | length 451.5
  Top Layer w10: U1.22 3150,2950.79 3145,2945.79 3145,2895 3156,2884 3156,2830 3171,2815 3171,2787.5 3183.5,2775 3262,2775 3295,2808 R13.1
SPI1_MOSI: R12.1 U1.23 | length 84.6
  Top Layer w10: U1.23 3275.47,2970.47 R12.1
SPI2_CLK: R9.2 U1.29 | length 150
  Top Layer w10: U1.29 3258.42,3088.58 3272,3075 3272,3065 3273,3064 3327.46,3064 3328.46,3065 R9.2
SPI2_MISO: R8.1 U1.10 | length 1130.9
  Top Layer w10: U1.10 3029.53,2828.53 3061,2860 v1(3061,2909.5) ; R8.1 3391.54,3146.46 v1(3457,3081)
  Bottom Layer w10: v1(3061,2909.5) 3052.34,2918.16 3014.84,2918.16 2959,2974 2959,3025 2975,3041 3037.5,3041 3050,3028.5 3050,2971 3062,2959 3225,2959 3241,2975 3241,3050 3255,3064 3337,3064 3376,3025 3401,3025 v1(3457,3081)
SPI2_MOSI: R10.2 U1.11 | length 81.5
  Top Layer w10: R10.2 U1.11
SWCLK: SWD.2 U1.49 | length 1358
  Top Layer w10: SWD.2 2260,2316 2508,2564 v1(2615.5,2564) ; v1(2753,3176) 2753,3147.64 U1.49
  Bottom Layer w10: v1(2615.5,2564) 2615.5,2786.5 2602,2800 2602,3130 2590.5,3141.5 2590.5,3162.5 2604,3176 v1(2753,3176)
SWDIO: SWD.3 U1.46 | length 2073.9
  Top Layer w10: v1(2815.5,3236.5) 2841,3262 2841,3350 2854,3363 2889,3363 2902,3350 2902,3277.27 2891.73,3267 U1.46
  Bottom Layer w10: SWD.3 2418,2192 2737.5,2192 2751,2205.5 2751,2380.66 2586,2545.66 2586,3101.5 2573.5,3114 2573.5,3192 2619.5,3238 2814,3238 v1(2815.5,3236.5)
USART1_RX: U1.43 U6.1 | length 1040.2
  Top Layer w10: U1.43 2950.79,3137.71 2970,3118.5 v1(2991.84,3118.5)
  Bottom Layer w10: v1@2985,3118.5 v1(2991.84,3118.5) 3052.34,3118.5 3070.84,3100 3176.5,3100 3197.37,3120.87 3703.76,3120.87 3746.12,3163.23 3746.12,3187.5 3732.62,3201 3685.43,3201 U6.1
USART1_TX: U1.42 U6.2 | length 857.2
  Top Layer w10: U1.42 2970.47,3303.1 v1(3017.37,3350)
  Bottom Layer w10: v1(3017.37,3350) 3580.5,3350 3626.38,3304.12 U6.2
USART2_RX: U1.17 U4.3 | length 1033.8
  Top Layer w10: v1(2753,3215) v1(2753,3402) ; v1(2906,3070) 3015,2961 v1(3015,2891) ; v1(3210,2814) 3210,2852.36 U1.17
  Bottom Layer w10: U4.3 2740.5,3425 2753,3412.5 v1(2753,3402) ; v1(2753,3215) 2783,3185 2900,3185 2910,3175 2910,3074 v1(2906,3070) ; v1(3015,2891) 3029,2877 3075,2877 3138,2814 v1(3210,2814)
USART2_TX: U1.16 U4.2 | length 1133.5
  Top Layer w10: U1.16 3147.64,2737.36 v1(3163.5,2721.5)
  Bottom Layer w10: U4.2 2797,3525 2822,3500 2822,3293 2930,3185 2930,3036 2941,3025 2941,2969.37 2991.84,2918.53 2991.84,2868.16 3138.5,2721.5 v1(3163.5,2721.5)
USB_5V: C7.2 R3.2 R4.2 R5.1 S1.3 U2.4 USB1.1 | length 2279.4
  Top Layer w10: USB1.1 2948.82,2184.68 2965.89,2167.61 3116.57,2167.61 3119.96,2171 3320.92,2171 S1.3 ; v1(3537,2638) 3399,2776 3399,2974 3406.2,2981.2 3406.2,3040 3416.2,3050 R5.1 3430.79,3049.21 R4.2 R3.2 ; v1(3886,2498.8) 3908.8,2498.8 3910,2500 ; U2.4 3910,2500 ; C7.2 3910,2455.63 3910,2500
  Bottom Layer w10: S1.3 3595.92,2446 3738,2446 ; v1(3537,2638) 3617,2638 3738,2517 3738,2446 ; v1(3886,2498.8) 3886,2476 3856,2446 3738,2446
USB_DM: U1.44 USB1.2 | length 1396.8
  Top Layer w10: v1(2883.84,3162) 2918.1,3162 2931.1,3175 U1.44 ; v1(2962,2392) 2974.41,2379.59 USB1.2
  Bottom Layer w10: v1(2883.84,3162) 2883.84,3100 2871.34,3087.5 2816.5,3087.5 2759,3030 2759,2975 2742,2958 2662.5,2958 2639.5,2935 2639.5,2858 2705,2792.5 2705,2641 2769,2577 2769,2475 2852,2392 v1(2962,2392)
USB_DP: U1.45 USB1.3 | length 3842
  Top Layer w10: U1.45 2911.42,3258.42 2918,3265 2918,3325 v1(2977,3384) ; USB1.3 3000,2192 3008.39,2183.61 3101,2183.61 3108.39,2191 3312.5,2191 3349,2227.5 3349,2287.5 3362.5,2301 3438.5,2301 3451.66,2287.84 3451.66,2075.34 3473,2054 3962.5,2054 3975,2066.5 3975,3348 v1(3945,3378)
  Bottom Layer w10: v1(2977,3384) 3649,3384 3659,3394 3929,3394 v1(3945,3378)
VCC: C12.1 C14.2 C16.2 U1.1 U1.13 U1.19 U1.32 U1.48 U1.64 U3.3 U3.7 U3.8 U4.1 U4.8 U5.1 U6.12 VCC.A VR1.2 | length 5628
  Top Layer w10: v1(2374,3368) 2530,3368 2618.12,3279.88 v1(2618.12,3153) ; VCC.A 2620.63,2760.63 v1@2640.83,2780.83 ; v1(2639.17,2780.83) v1@2640.83,2780.83 ; U1.64 2781.5,2824.5 2765,2808 C16.2 ; v1(2789,2688) 2789,2779.83 2788,2780.83 ; v1(2792,2563) 2848.69,2563 2849.69,2564 C12.1 ; U1.1 2808.67,2781.5 2808,2780.83 2788,2780.83 ; U1.48 v1@2852.36,3142.64 ; v1(2858,3137) v1@2852.36,3142.64 ; v1(2907,2491) 2907,2519.76 VR1.2 C14.2 ; v1(3029,3165) 3029,3109.5 3012.5,3093 ; v1(3079,2726) 3088.58,2735.58 U1.13 3088.58,2811.42 3089,2811.84 3089,2945.5 3114.48,2970.98 3114.48,3078.52 3100,3093 3012.5,3093 ; v1(3218,3302) 3218,3147.64 U1.32 ; U1.19 3173,2891.73 3172,2890.73 3172,2836.63 3187,2821.63 3187,2804 3200,2791 3232,2791 v1(3254,2813) ; U3.8 U3.7 3425,3433.33 3475,3383.33 3475,3325 ; U3.3 3475,3325 ; v1(3500,3327) 3477,3327 3475,3325 ; v1@2640.83,2780.83 C16.2 ; C16.2 2788,2780.83 ; v1@2852.36,3142.64 2852.36,3106.64 2866,3093 3012.5,3093
  Bottom Layer w10: U4.8 2361.5,3625 ; v1(2374,3368) 2374,3612.5 2361.5,3625 ; v1(2618.12,3153) 2700,3071.12 U5.1 ; v1(2639.17,2780.83) 2639.17,2834.83 2623.5,2850.5 2623.5,2979 2644.5,3000 U5.1 ; U4.1 2361.5,3625 ; v1(2789,2688) 2789,2566 v1(2792,2563) 2869,2563 2907,2525 v1(2907,2491) ; v1(2858,3137) 2837,3137 U5.1 ; v1(3029,3165) 3035.83,3171.83 U6.12 U6.12@3035.83,3270 ; v1(3079,2726) 3110.41,2726 3186.41,2650 3233.41,2650 3282,2698.59 3282,2785 v1(3254,2813) ; v1(3218,3302) 3067.83,3302 3055.83,3290 ; v1(3500,3327) 3505,3327 3468,3290 3055.83,3290 ; U6.12@3035.83,3270 3055.83,3290 ; U6.12@3035.83,3270 3035.83,3275.83 3050,3290 3055.83,3290
VEX: C13.1 C15.2 P4.2 VEX.A VR2.2 | length 2707.3
  Top Layer w10: VEX.A v1(2480,2821) ; v1(2514,2613) 2515,2614 2820,2614 2827,2621 2849.09,2621 2865,2636.91 2961,2636.91 3032.91,2565 3143.69,2565 3144.69,2566 ; C13.1 3144.69,2566 ; C15.2 VR2.2 3162.42,2519.76 3144.69,2537.5 3144.69,2566
  Bottom Layer w10: v1(2514,2613) 2514,2787 v1(2480,2821) 2480,3500.5 2558.5,3579 2745,3579 2746,3580 2746,3676 2745,3677 2675,3677 2659,3693 2659,3940 2660,3941 2759,3941 P4.2
VIN: C10.2 C11.2 R16.2 S1.2 U7.5 VR1.3 VR2.3 | length 3110.3
  Top Layer w10: C10.2 VR1.3 2825,2482.36 2841,2498.36 2841,2525.63 2881,2565.63 2881,2620 2881.91,2620.91 2945.21,2620.91 3030,2536.12 C11.2 VR2.3 3219.64,2482.36 3369,2333 3475,2333 3518.03,2289.97 S1.2 ; R16.2 U7.5 3684.4,3362.6 v1(3692,3355)
  Bottom Layer w10: S1.2 3609.03,2159 3941,2159 3963,2181 3963,3306.5 3940.5,3329 3786,3329 3760,3355 v1(3692,3355)
pads on no net: S1.0 U1.2 U1.30 U1.39 U1.40 U1.41 U1.50 U1.51 U1.52 U1.53 U1.61 U1.62 U2.0 U4.6 U4.7 U5.5 U5.6 U6.3 U6.4 U6.5 U6.6 U6.7 U6.8 U6.9 U6.10 U6.15 U6.16 U6.17 U6.18 U6.19 U6.20 U6.26 U6.27 U6.29 U6.30 U6.31 U6.32 U6.33 U6.34 USB1.0

## Keep-outs
Keep-Out Layer:
  the board outline again, w10

## Silkscreen, mask and mechanical layers (free items; w line width, h text height)
Top Overlay:
  text "PPGColle v1.0" at 2400,3700 h100
  text "by drzzm32" at 2710,3602.64 h60
  text "NSDN-PCB 0009" at 2685,3502.36 h50

## Text inside footprints (layer, text, board x,y; h text height)
U4: Bottom Overlay "VCC" at 2640,3606 h35; Bottom Overlay "VCC" at 2250,3606 h35; Bottom Overlay "GND" at 2640,3306 h35; Bottom Overlay "GND" at 2250,3306 h35; Bottom Overlay "RX" at 2630,3506 h35; Bottom Overlay "TX" at 2630,3406 h35; Bottom Overlay "SDA" at 2250,3406 h35; Bottom Overlay "SCL" at 2250,3506 h35